# EAGLE board knop_midi_controller (EAGLE 9.6.2)
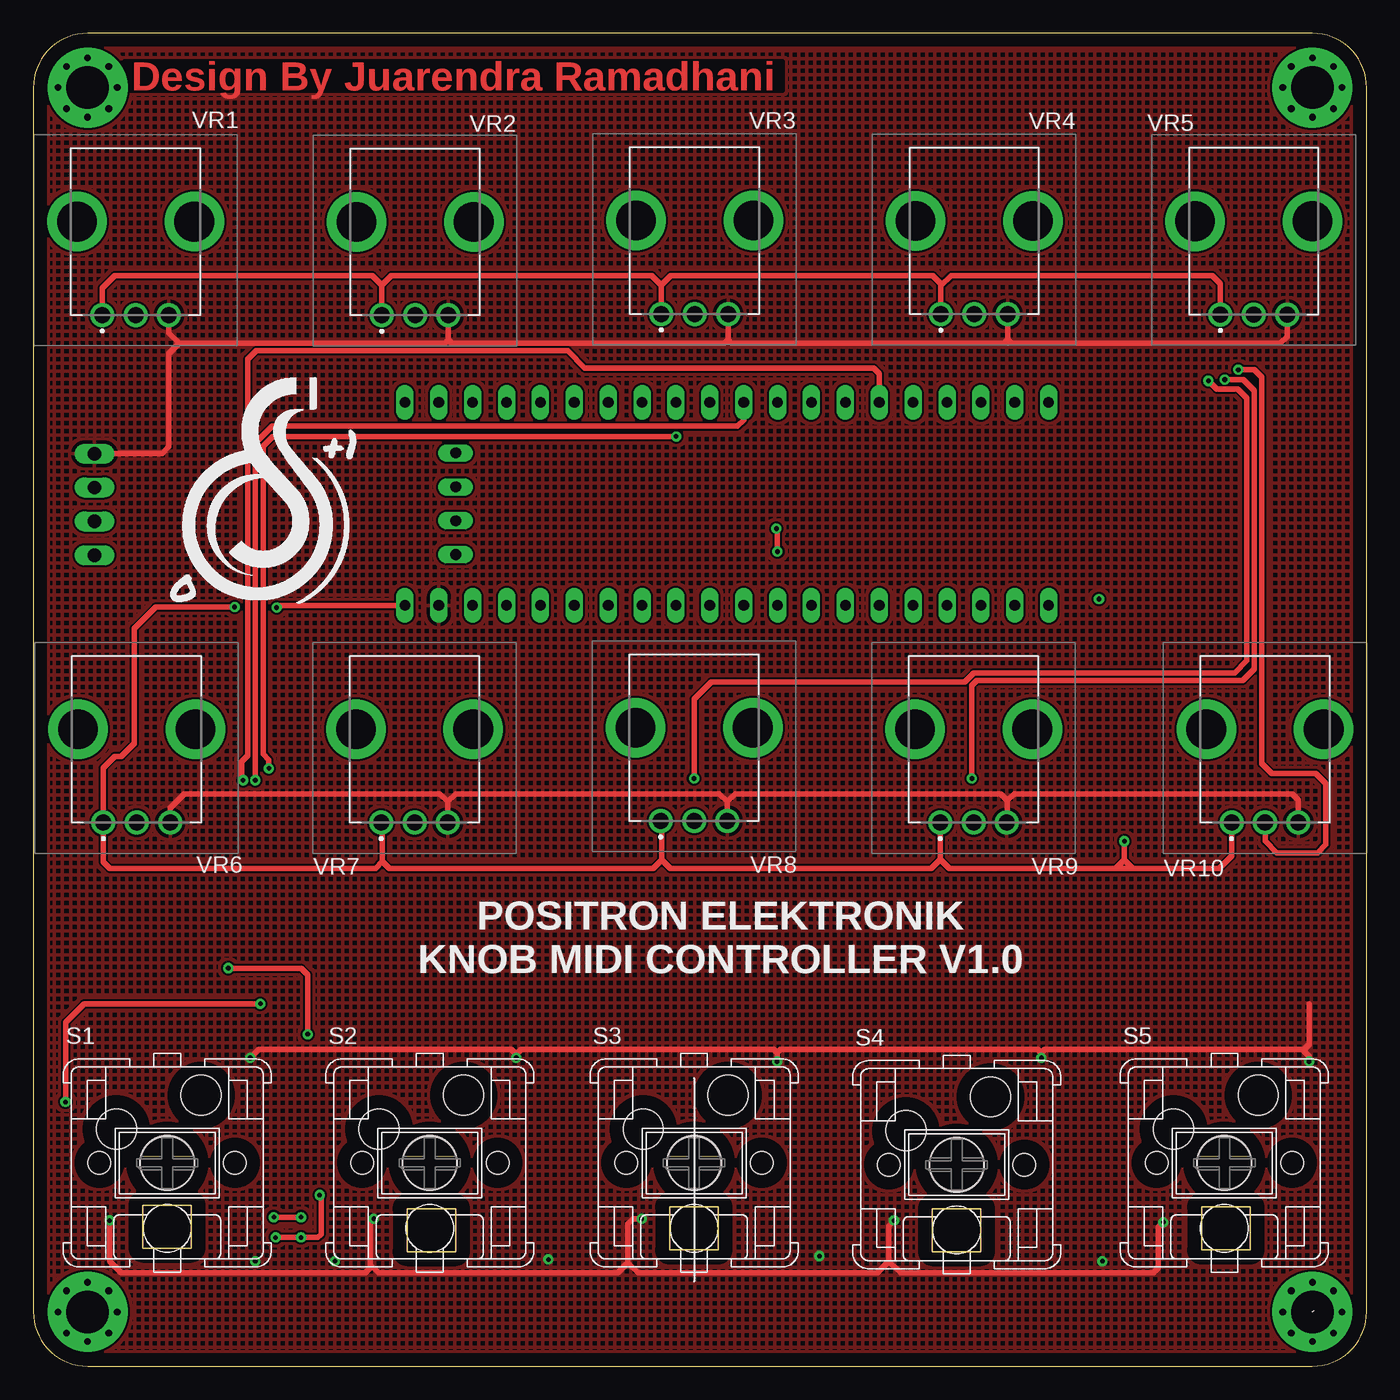
[diagram p0: board, top side]
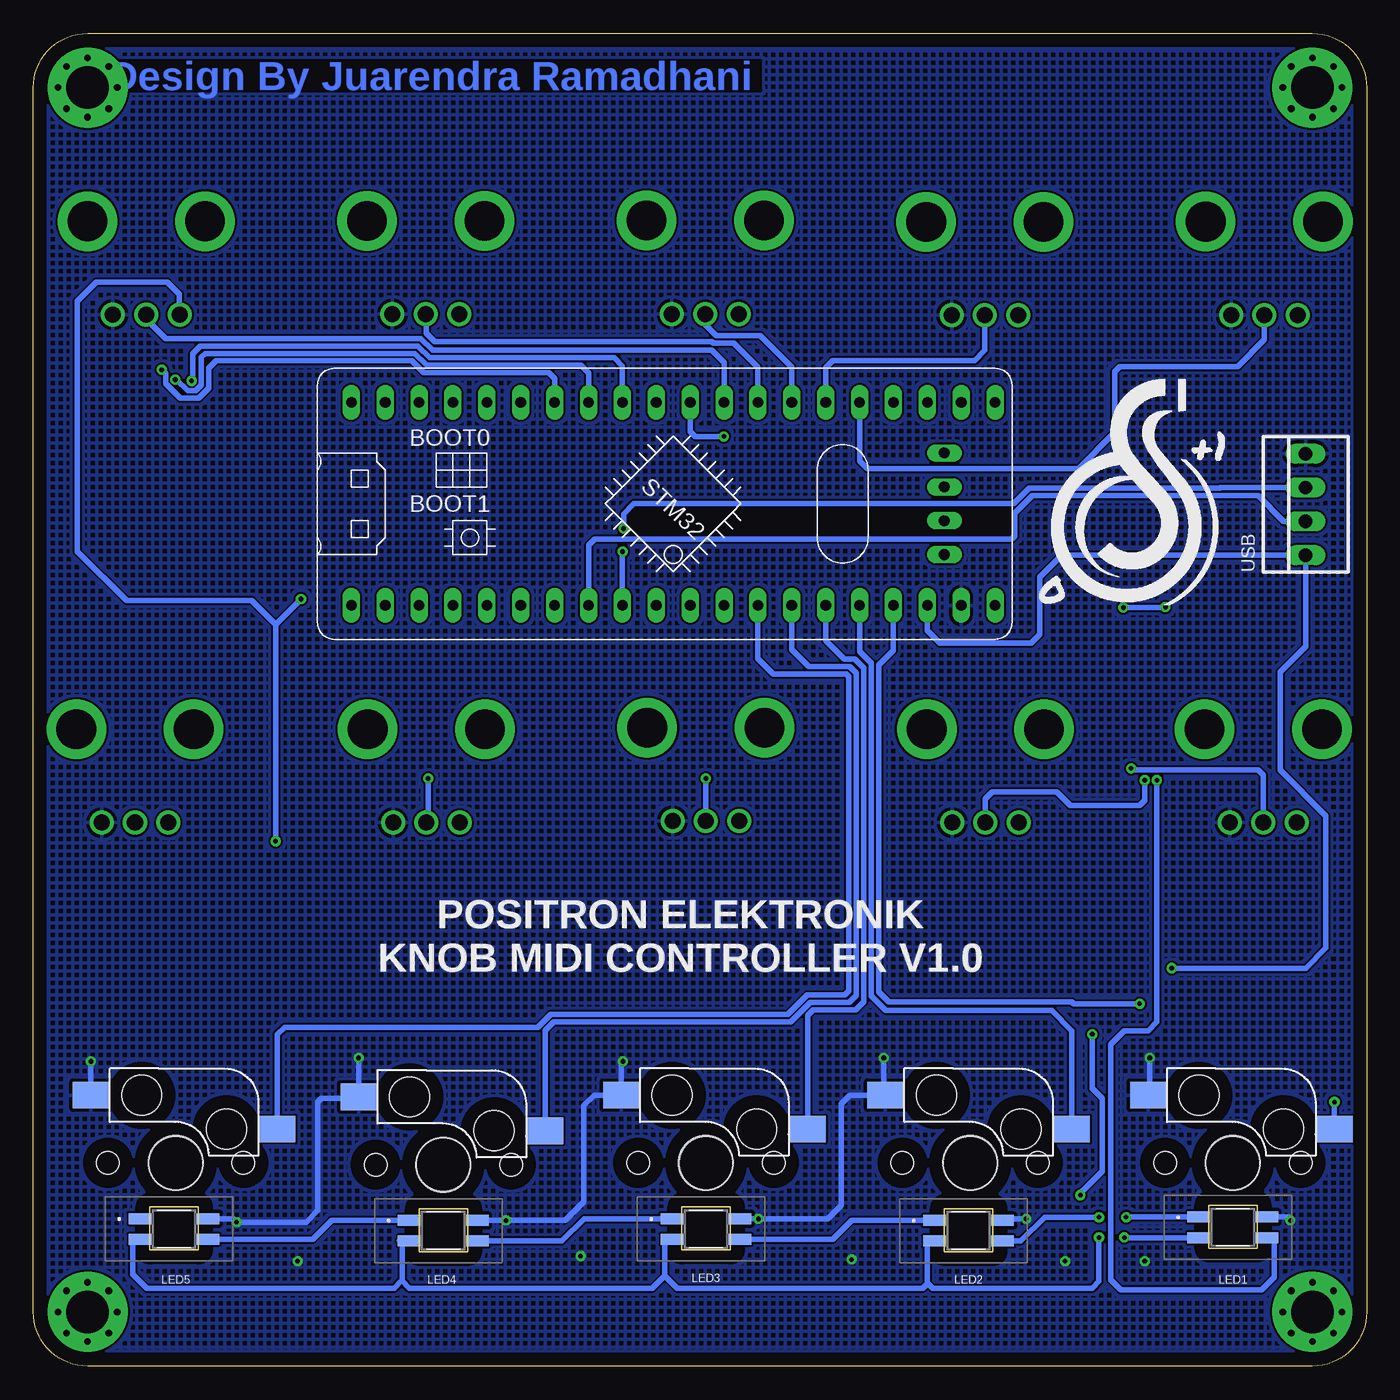
[diagram p1: board, bottom side, seen from below]

Size 99.95 x 99.95 mm. Coordinates in mm from the lower left corner, seen from the top.
Outline: 95.88,99.95 4.06,99.95 arc90 0,95.88 0,4.06 arc90 4.06,0 95.88,0 arc90 99.95,4.06 99.95,95.88 arc90 95.88,99.95
Copper layers (1*16): Top 0.035mm / dielectric 1.5mm / Bottom 0.035mm
Design rules "default *": minimum track width 6mil, minimum drill 0.35mm, track to track 6mil, track to pad 6mil, pad to pad 6mil, via to via 6mil, smd to smd 6mil, copper to edge 40mil, drill to drill 6mil, minimum pad ring 10mil, minimum via ring 8mil, stop-mask expansion 4mil, vias tented up to drill 0.36mm, thermal gap 10mil

## Footprints (pad centres in the part's own frame; a part is rotated, then mirrored left to right if it is on the bottom)
3MM_HOLE = drill 3.2 pad 6: P$1 0,0 | drill 0.5 pad 0.61: P$2 0,2.223; P$3 0,-2.223; P$4 2.223,0; P$5 -2.223,0; P$6 -1.587,1.587; P$7 1.587,1.587; P$8 1.587,-1.587; P$9 -1.587,-1.587
SK6812MINIE = smd 1.8 x 0.82: 1 -2.5,-0.774; 2 -2.5,0.774; 3 2.5,0.774; 4 2.5,-0.774
BLUE_PILL = drill 0.8 long: P$1 -7.62,15.24; P$2 -7.62,12.7; P$3 -7.62,10.16; P$4 -7.62,7.62; P$5 -7.62,5.08; P$6 -7.62,2.54; P$7 -7.62,0; P$8 -7.62,-2.54; P$9 -7.62,-5.08; P$10 -7.62,-7.62; P$11 -7.62,-10.16; P$12 -7.62,-12.7; P$13 -7.62,-15.24; P$14 -7.62,-17.78; P$15 -7.62,-20.32; P$16 -7.62,-22.86; P$17 -7.62,-25.4; P$18 -7.62,-27.94; P$19 -7.62,-30.48; P$20 -7.62,-33.02; P$21 7.62,15.24; P$22 7.62,12.7; P$23 7.62,10.16; P$24 7.62,7.62; P$25 7.62,5.08; P$26 7.62,2.54; P$27 7.62,0; P$28 7.62,-2.54; P$29 7.62,-5.08; P$30 7.62,-7.62; P$31 7.62,-10.16; P$32 7.62,-12.7; P$33 7.62,-15.24; P$34 7.62,-17.78; P$35 7.62,-20.32; P$36 7.62,-22.86; P$37 7.62,-25.4; P$38 7.62,-27.94; P$39 7.62,-30.48; P$40 7.62,-33.02; P$41 -1.27,-29.21; P$42 -3.81,-29.21; P$43 1.27,-29.21; P$44 3.81,-29.21
CHERRY_MX_WITH_KEIL = smd 2.7 x 2 bottom: 1 6.355,5.08; 2 -7.625,2.54 | hole 1.7: -5.08,0; 5.08,0; -5.08,0; 5.08,0 | hole 4.1: 0,0 | hole 4: 0,0 | hole 3: 2.54,5.08; -3.81,2.54
22-23-2041 = drill 1 long: 1 -3.81,0; 2 -1.27,0; 3 1.27,0; 4 3.81,0
PTV09A4020FB103 = drill 1.2 pad 1.8: 1 -2.5,-5.6; 2 0,-5.6; 3 2.5,-5.6 | drill 2.973 pad 4.46: 4 -4.4,1.4; 5 4.4,1.4

## Placement (x,y rotation side)
H1  3MM_HOLE  [3MM_HOLE]  4.06,4.06 0 top
H2  3MM_HOLE  [3MM_HOLE]  95.88,4.06 0 bottom
H3  3MM_HOLE  [3MM_HOLE]  4.06,95.88 0 top
H4  3MM_HOLE  [3MM_HOLE]  95.88,95.88 0 top
LED1  SK6812MINI-E  [SK6812MINIE]  10.03,10.41 0 bottom
LED2  SK6812MINI-E  [SK6812MINIE]  29.84,10.16 0 bottom
LED3  SK6812MINI-E  [SK6812MINIE]  49.53,10.29 0 bottom
LED4  SK6812MINI-E  [SK6812MINIE]  69.22,10.16 0 bottom
LED5  SK6812MINI-E  [SK6812MINIE]  89.41,10.29 0 bottom
MOD1  [BLUE_PILL]  60.87,64.67 90 bottom
S1  CHERRY_MX_WITH_KEILWITH_KEIL  [CHERRY_MX_WITH_KEIL]  10.03,15.24 0 top
S2  CHERRY_MX_WITH_KEILWITH_KEIL  [CHERRY_MX_WITH_KEIL]  29.72,15.24 0 top
S3  CHERRY_MX_WITH_KEILWITH_KEIL  [CHERRY_MX_WITH_KEIL]  49.53,15.24 0 top
S4  CHERRY_MX_WITH_KEILWITH_KEIL  [CHERRY_MX_WITH_KEIL]  69.22,15.11 0 top
S5  CHERRY_MX_WITH_KEILWITH_KEIL  [CHERRY_MX_WITH_KEIL]  89.28,15.24 0 top
USB  22-23-2041  [22-23-2041]  4.57,64.62 90 bottom
VR1  PTV09A-4030U-B204  [PTV09A4020FB103]  7.66,84.43 0 top
VR2  PTV09A-4030U-B204  [PTV09A4020FB103]  28.62,84.41 0 top
VR3  PTV09A-4030U-B204  [PTV09A4020FB103]  49.58,84.51 0 top
VR4  PTV09A-4030U-B204  [PTV09A4020FB103]  70.53,84.49 0 top
VR5  PTV09A-4030U-B204  [PTV09A4020FB103]  91.48,84.46 0 top
VR6  PTV09A-4030U-B204  [PTV09A4020FB103]  7.75,46.36 0 top
VR7  PTV09A-4030U-B204  [PTV09A4020FB103]  28.58,46.36 0 top
VR8  PTV09A-4030U-B204  [PTV09A4020FB103]  49.53,46.48 0 top
VR9  PTV09A-4030U-B204  [PTV09A4020FB103]  70.48,46.36 0 top
VR10  PTV09A-4030U-B204  [PTV09A4020FB103]  92.33,46.36 0 top

## Library data of the parts
H1-H4 = 3mm_special_hole
LED1-LED5 = SK6812MINI-E; DESCRIPTION: 3.2x2.8x1.78 mm 0.2W Intelligent external control surface mount SMD LED (MSL:5a); HEIGHT: 1.88mm; MANUFACTURER_NAME: Yellow Stone Corp.; MANUFACTURER_PART_NUMBER: SK6812MINI-E
MOD1 = STM32F103-BLUEPILL-BOARD
S1-S5 = cherry
USB = con-molex; MF: MOLEX; MPN: 22-23-2041; OC_FARNELL: 1462920; OC_NEWARK: 38C0355
VR1-VR10 = PTV09A-4030U-B204; DESCRIPTION: Potentiometers 200K LINEAR 20%; HEIGHT: mm; MANUFACTURER_NAME: Bourns; MANUFACTURER_PART_NUMBER: PTV09A-4030U-B204; MOUSER_PART_NUMBER: 652-PTV09A-4030UB204; MOUSER_PRICE-STOCK: https://www.mouser.co.uk/ProductDetail/Bourns/PTV09A-4030U-B204?qs=Qzws7J6gxqzDMgIeyq56PQ%3D%3D

## Nets
+3V3: MOD1.P$20 VR1.1 VR2.1 VR3.1 VR4.1 VR5.1 VR6.1 VR7.1 VR8.1 VR9.1 VR10.1
+5V/1: LED1.1 LED2.1 LED3.1 LED4.1 LED5.1 MOD1.P$18 USB.1
BUT1: MOD1.P$17 S1.2
BUT2: MOD1.P$16 S2.2
BUT3: MOD1.P$15 S3.2
BUT4: MOD1.P$14 S4.2
BUT5: MOD1.P$13 S5.2
D+: MOD1.P$9 USB.3
D-: MOD1.P$8 USB.2
GND: LED1.3 LED2.3 LED3.3 LED4.3 LED5.3 MOD1.P$19 S1.1 S2.1 S3.1 S4.1 S5.1 USB.4 VR1.3 VR2.3 VR3.3 VR4.3 VR5.3 VR6.3 VR7.3 VR8.3 VR9.3 VR10.3
N$1: LED1.2 LED2.4
N$2: LED2.2 LED3.4
N$3: LED3.2 LED4.4
N$4: LED4.2 LED5.4
POT1: MOD1.P$36 VR1.2
POT2: MOD1.P$35 VR2.2
POT3: MOD1.P$34 VR3.2
POT4: MOD1.P$33 VR4.2
POT5: MOD1.P$32 VR5.2
POT6: MOD1.P$31 VR6.2
POT7: MOD1.P$30 VR7.2
POT8: MOD1.P$29 VR8.2
POT9: MOD1.P$28 VR9.2
POT10: MOD1.P$27 VR10.2
RGB: LED1.4 MOD1.P$26

## Tracks (layer width: path | path; a pad name or v marks a point on that pad's centre or on a via)
+3V3  (via drill 0.35)
  Top 0.406: VR1.1 5.16,80.86 6.1,81.79 25.4,81.79 26.12,81.07 | VR2.1 26.12,81.07 | 26.12,81.07 26.84,81.79 46.35,81.79 47.08,81.07 | VR3.1 47.08,81.07 | 47.08,81.07 47.8,81.79 67.44,81.79 68.03,81.19 68.03,81.03 | 68.03,81.03 VR4.1 | 68.03,81.03 68.79,81.79 88.39,81.79 88.98,81.19 VR5.1 | 26.16,37.85 25.65,37.34 5.72,37.34 5.25,37.81 VR6.1 5.25,44.87 6.1,45.72 6.58,45.72 7.57,46.71 7.57,55.32 9.17,56.92 v15.09,56.92 | 26.16,37.85 26.16,40.67 VR7.1 | 26.16,37.85 26.67,37.34 46.48,37.34 47.12,37.97 | 47.12,37.97 47.12,40.8 VR8.1 | 47.12,37.97 47.75,37.34 67.31,37.34 67.98,38.01 | VR9.1 67.98,38.01 | 67.98,38.01 68.66,37.34 81.15,37.34 | VR10.1 89.83,38.27 88.9,37.34 82.42,37.34 | 81.15,37.34 82.42,37.34 | v81.79,39.37 81.79,37.97 | 81.79,37.97 81.15,37.34 | 81.79,37.97 82.42,37.34 | MOD1.P$20 18.39,57.05 v18.24,56.9
  Bottom 0.406: v81.79,39.37 81.79,55.63 | v79.88,57.53 81.79,55.63 | 81.79,55.63 83.57,57.4 92.96,57.4 96.65,61.09 96.65,79.88 95.25,81.28 89.92,81.28 89.03,80.39 89.03,78.9 VR5.1 | v18.24,56.9 15.11,56.9 v15.09,56.92
+5V/1  (via drill 0.35)
  Top 0.406: v18.16,9.65 v20.07,9.65 21.34,9.65 21.59,9.91 21.59,12.7 v21.46,12.83 | v14.6,29.84 20.07,29.84 20.57,29.34 v20.57,24.89
  Bottom 0.406: LED1.1 18.15,9.64 v18.16,9.65 | v20.07,9.65 20.07,6.35 20.57,5.84 32.51,5.84 32.89,6.22 | 32.89,6.22 32.93,6.26 32.93,9.39 LED2.1 | 32.89,6.22 33.27,5.84 51.69,5.84 52.62,6.77 | 52.58,9.53 52.57,9.51 LED3.1 52.62,9.51 52.62,6.77 | 52.62,6.77 53.54,5.84 71.75,5.84 72.3,6.39 | 72.52,9.39 72.3,9.39 | 72.3,6.39 72.3,9.39 | 72.3,6.39 72.35,6.39 72.9,5.84 91.44,5.84 92.49,6.9 92.49,9.51 LED5.1 | LED4.1 72.3,9.39 | v21.46,12.83 21.46,12.95 19.81,14.61 19.81,20.07 20.57,20.83 v20.57,24.89 | v14.6,29.84 4.57,29.84 3.05,31.37 3.05,41.28 6.48,44.7 6.48,52.07 4.57,53.97 USB.1 4.6,60.83 22.86,60.83 24.51,59.18 24.51,54.86 25.15,54.23 32,54.23 32.93,55.16 MOD1.P$18
BUT1  (via drill 0.35)
  Top 0.406: v17.02,27.18 3.81,27.18 2.41,25.78 v2.41,19.81
  Bottom 0.406: v17.02,27.18 21.97,27.18 22.1,27.3 35.81,27.3 36.58,28.07 36.58,52.58 35.47,53.68 MOD1.P$17 | v2.41,19.81 S1.2
BUT2
  Bottom 0.406: S2.2 22.09,25.14 23.62,26.67 36.04,26.67 37.13,27.76 37.13,52.73 38.01,53.61 MOD1.P$16
BUT3
  Bottom 0.406: MOD1.P$15 40.55,54.42 39.17,53.03 38.38,53.03 37.69,52.35 37.69,28.91 37.69,28.63 37.69,27.33 38.3,26.72 41.48,26.72 41.91,26.29 S3.2
BUT4
  Bottom 0.406: S4.2 61.59,25.17 60.93,25.83 43.16,25.83 41.71,27.28 38.79,27.28 38.25,27.81 38.25,51.99 38.73,52.48 41.83,52.48 43.09,53.73 MOD1.P$14
BUT5
  Bottom 0.406: S5.2 81.66,24.87 81.11,25.41 62.14,25.41 61.16,26.39 43.39,26.39 41.94,27.84 39.12,27.84 38.81,28.14 38.81,51.71 39.01,51.92 44.47,51.92 45.63,53.07 MOD1.P$13
D+  (via drill 0.35)
  Top 0.406: v55.78,61.09 55.78,62.74 v55.7,62.81
  Bottom 0.406: 4.85,66.17 USB.3 10.97,65.89 11.02,65.84 25.3,65.84 26.47,64.67 54.94,64.67 55.7,63.91 v55.7,62.81 | MOD1.P$9 55.79,61.07 v55.78,61.09
D-
  Bottom 0.406: USB.2 6.2,63.35 8.13,65.28 25.07,65.28 26.36,63.98 26.36,62.25 26.59,62.03 57.86,62.03 58.33,61.56 MOD1.P$8
GND  (via drill 0.35)
  Top 0.406: VR1.3 10.16,77.47 10.92,76.71 | VR2.3 31.12,76.97 | 10.92,76.71 30.86,76.71 31.12,76.97 | 31.12,76.97 31.38,76.71 51.82,76.71 52.08,76.97 | VR3.3 52.08,76.97 | 52.08,76.97 52.33,76.71 72.77,76.71 73.03,76.97 | VR4.3 73.03,76.97 | 73.03,76.97 73.29,76.71 93.47,76.71 93.98,77.22 VR5.3 | 10.92,76.71 10.16,75.95 10.16,68.96 9.65,68.45 4.6,68.45 USB.4 | VR6.3 10.25,41.87 11.3,42.93 30.48,42.93 31.08,42.33 | VR7.3 31.08,42.33 | 31.08,42.33 31.67,42.93 51.44,42.93 52.03,42.33 | VR8.3 52.03,42.33 | 52.03,42.33 52.62,42.93 72.52,42.93 73.03,42.42 | 73.03,42.42 73.03,40.8 VR9.3 | 73.03,42.42 73.53,42.93 94.36,42.93 94.83,42.46 VR10.3 | v5.72,10.92 5.72,7.87 6.6,6.99 24.89,6.99 25.27,7.37 25.27,7.62 | v25.53,11.05 25.27,10.79 25.27,7.62 | 25.27,7.62 25.91,6.99 43.81,6.99 44.58,7.75 | 44.58,7.75 44.58,10.67 44.96,11.05 v45.59,11.05 | 44.58,7.75 45.34,6.99 63.25,6.99 64.13,7.87 | v64.52,10.92 64.13,10.54 64.13,7.87 | 64.13,7.87 65.02,6.99 83.95,6.99 84.33,7.37 84.33,10.41 v84.71,10.79 | v16.26,23.11 16.89,23.75 35.81,23.75 36.19,23.37 | v36.19,23.11 36.19,23.37 | 36.19,23.37 36.58,23.75 55.5,23.75 55.75,23.5 | v55.75,22.86 55.75,23.5 | 55.75,23.5 56.01,23.75 75.31,23.75 75.56,23.5 | v75.56,23.11 75.56,23.5 | 75.56,23.5 75.82,23.75 95.12,23.75 95.19,23.69 | v95.63,22.86 95.63,23.24 95.19,23.69 | 95.19,23.69 95.63,24.13 95.63,27.18
  Bottom 0.406: LED1.3 5.85,11.19 5.72,11.05 v5.72,10.92 | v25.53,11.05 26.62,11.05 26.73,10.93 LED2.3 | LED3.3 v45.6,11.06 v45.59,11.05 40.39,11.05 39.37,12.06 39.37,19.68 38.73,20.32 36.7,20.32 | LED4.3 64.53,10.93 v64.52,10.92 60.07,10.92 58.67,12.32 58.67,19.56 57.91,20.32 S3.1 55.88,22.73 v55.75,22.86 | LED5.3 84.97,11.06 v84.71,10.79 79.5,10.79 78.61,11.68 78.61,19.81 78.36,20.07 75.82,20.07 75.57,20.32 | S1.1 16.26,20.45 v16.26,23.11 | v36.19,23.11 36.19,20.44 S2.1 | v75.56,23.11 v75.57,23.11 75.57,20.32 | 75.57,20.32 S4.1 | v95.63,22.86 v95.64,22.86 S5.1
  other vias: 22.61,7.87 16.64,7.87 38.61,8 80.14,7.87 58.93,8.25
  pour Bottom (hatched): 0.51,100.08 100.33,100.08 100.33,0.64 99.57,-0.13 0.51,-0.13 0.13,0.25 0.13,99.69
  pour Top (hatched): 1.52,99.95 100.46,99.95 100.46,0.76 99.82,0.13 91.57,0.13 91.31,-0.13 0.51,-0.13 0,0.38 0,99.31 0.51,99.82 1.4,99.82
N$1  (via drill 0.35)
  Top 0.406: v18.03,11.18 v20.07,11.18
  Bottom 0.406: LED1.2 18.02,11.19 v18.03,11.18 | v20.07,11.18 24.13,11.18 25.92,9.39 LED2.4
N$2
  Bottom 0.406: LED2.2 38.6,10.93 40.02,9.51 46.42,9.51 46.42,9.65 46.56,9.51 LED3.4
N$3
  Bottom 0.406: LED3.2 58.66,11.06 60.34,9.39 LED4.4
N$4
  Bottom 0.406: LED4.2 77.59,10.93 79.01,9.51 LED5.4
POT1
  Bottom 0.406: VR1.2 7.66,76.97 9.68,74.95 18.52,74.95 18.87,74.6 18.87,70.03 21.59,67.31 37.44,67.31 38.01,67.88 MOD1.P$36
POT2
  Bottom 0.406: VR2.2 28.62,76.18 29.39,75.41 40,75.41 40.55,74.87 MOD1.P$35
POT3
  Bottom 0.406: MOD1.P$34 43.09,74.92 45.47,77.29 48.77,77.29 49.58,78.1 VR3.2
POT4
  Bottom 0.406: MOD1.P$33 45.63,74.92 47.45,76.73 49,76.73 49.1,76.83 69.88,76.83 70.51,77.47 70.51,78.87 VR4.2
POT5
  Bottom 0.406: MOD1.P$32 48.17,75.25 49.1,76.17 70,76.17 70.89,77.06 90.02,77.06 91.48,78.53 VR5.2
POT6  (via drill 0.35)
  Top 0.406: v17.65,44.83 17.65,45.47 17.22,45.9 17.22,69.01 17.94,69.72 v48.18,69.72
  Bottom 0.406: v17.65,44.83 17.53,44.7 8.13,44.7 7.75,44.32 VR6.2 | MOD1.P$31 50.71,70.09 50.34,69.72 v48.18,69.72
POT7  (via drill 0.35)
  Top 0.406: v16.64,43.94 16.64,69.22 17.91,70.48 52.78,70.48 53.25,70.95 MOD1.P$30
  Bottom 0.406: v16.64,43.94 16.64,42.42 17.02,42.04 22.22,42.04 23.24,43.05 28.07,43.05 28.58,42.55 VR7.2
POT8  (via drill 0.35)
  Top 0.406: v49.53,44.07 49.53,50.04 50.8,51.31 69.82,51.31 70.51,51.99 90.04,51.99 90.96,52.91 90.96,72.59 90.3,73.25 88.72,73.25 v88.09,73.89
  Bottom 0.406: v49.53,44.07 VR8.2 | MOD1.P$29 55.79,74.99 56.41,75.62 70.24,75.62 71.13,76.5 87.43,76.5 87.99,75.95 87.99,73.99 v88.09,73.89
POT9  (via drill 0.35)
  Top 0.406: v70.36,44.07 70.36,51.05 70.74,51.44 90.68,51.44 91.52,52.27 91.52,72.64 91.52,73.15 90.68,73.99 v89.31,73.99
  Bottom 0.406: v70.36,44.07 70.36,40.88 VR9.2 | MOD1.P$28 58.33,74.49 58.9,75.06 70.47,75.06 71.36,75.95 87.07,75.95 87.35,75.66 87.35,73.58 87.78,73.16 88.39,73.16 89.22,73.99 v89.31,73.99
POT10  (via drill 0.35)
  Top 0.406: VR10.2 92.33,39.37 93.22,38.48 96.27,38.48 96.9,39.12 96.9,43.69 96.14,44.45 92.84,44.45 92.07,45.21 92.07,74.17 91.52,74.72 v90.32,74.72 90.32,74.68
  Bottom 0.406: MOD1.P$27 60.87,74.05 61.32,74.5 70.7,74.5 71.59,75.39 86.24,75.39 86.79,74.83 86.79,73.35 87.55,72.6 88.95,72.6 90.04,73.68 90.04,74.44 v90.32,74.72
RGB  (via drill 0.35)
  Top 0.406: v15.73,43.94 15.62,44.05 15.62,45.34 16.08,45.8 16.08,75.51 16.71,76.15 40.06,76.15 41.35,74.85 62.99,74.85 63.41,74.44 MOD1.P$26
  Bottom 0.406: v15.73,43.94 15.73,25.8 16.38,25.15 18.16,25.15 19.18,24.13 19.18,6.48 18.41,5.71 7.87,5.71 6.92,6.67 6.92,9.64 LED1.4

## Text on the board
Top: Design By Juarendra Ramadhani
Bottom: Design By Juarendra Ramadhani
tPlace: POSITRON ELEKTRONIK / KNOB MIDI CONTROLLER V1.0
bPlace: POSITRON ELEKTRONIK / KNOB MIDI CONTROLLER V1.0
tStop: Design By Juarendra Ramadhani
bStop: Design By Juarendra Ramadhani